# EAGLE board untitled (EAGLE 7.2.0)
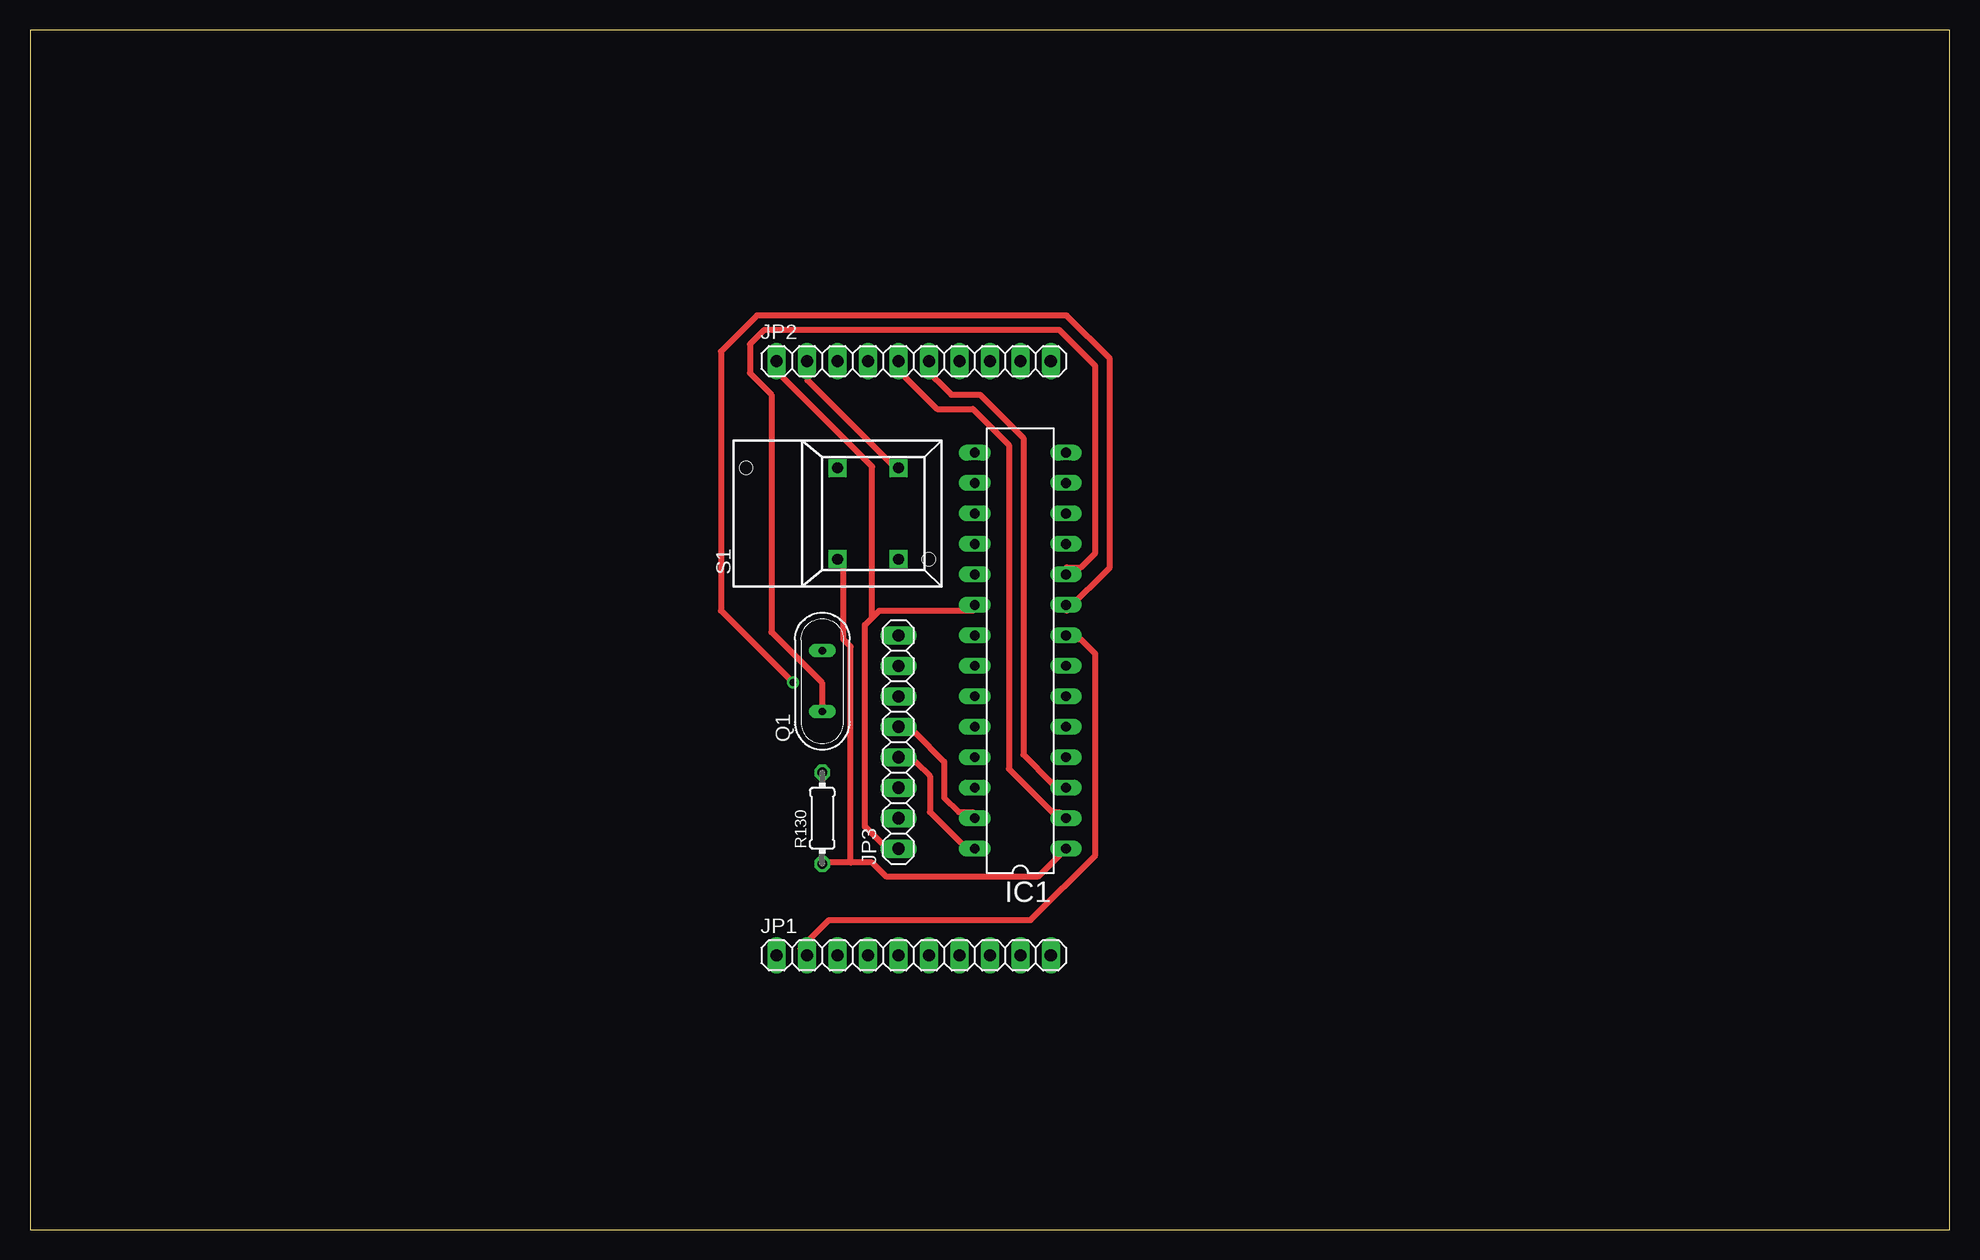
[diagram p0: board, top side]
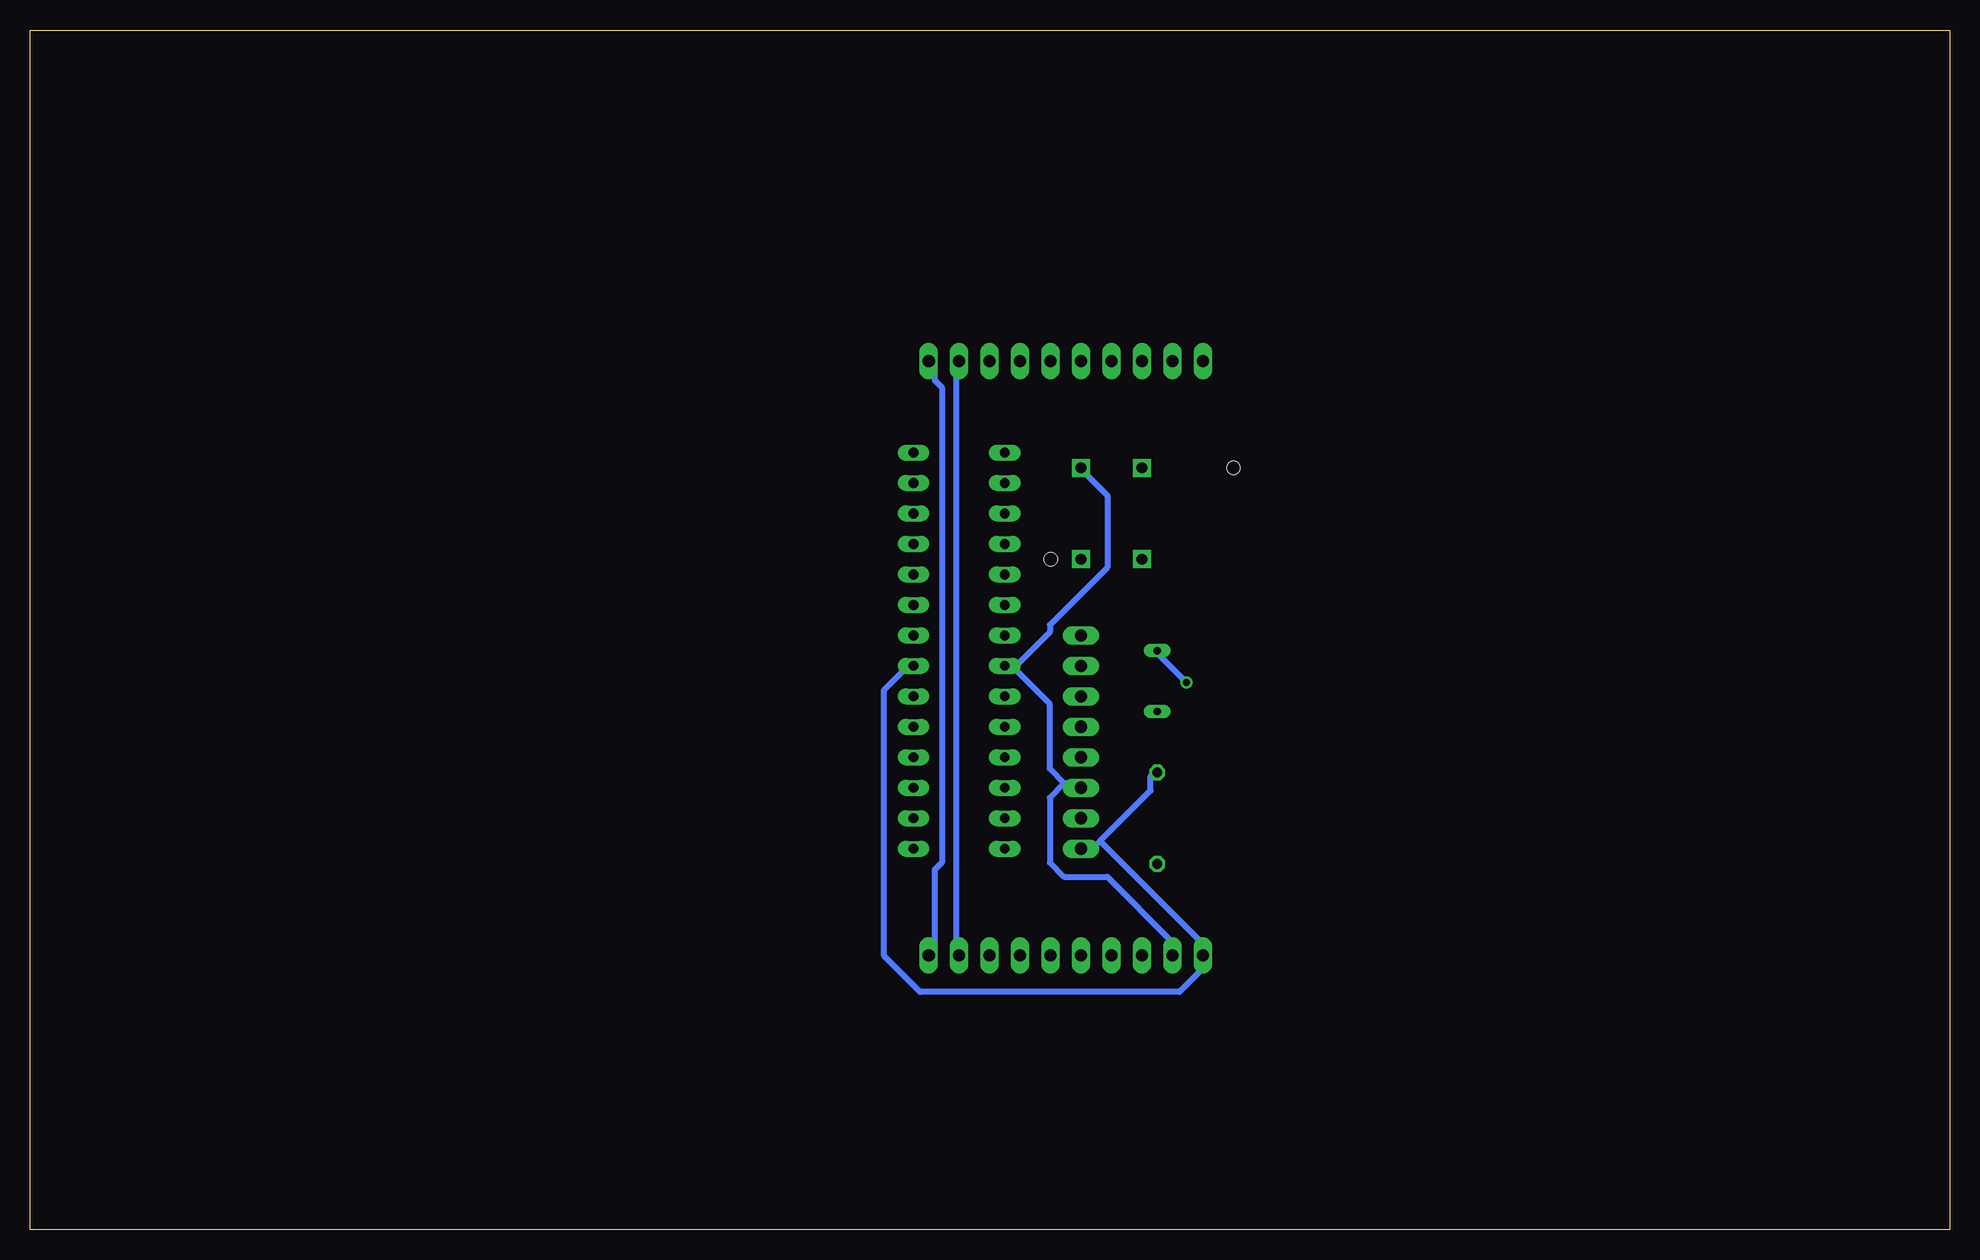
[diagram p1: board, bottom side, seen from below]

Size 160 x 100 mm. Coordinates in mm from the lower left corner, seen from the top.
Outline: 0,0 160,0 160,100 0,100 0,0
Copper layers (1*16): Top 0.035mm / dielectric 1.5mm / Bottom 0.035mm
Design rules "default *": minimum track width 0.5mm, minimum drill 24mil, track to track 0.7mm, track to pad 0.7mm, pad to pad 0.7mm, via to via 0.7mm, smd to smd 0.7mm, copper to edge 40mil, drill to drill 8mil, minimum pad ring 10mil, minimum via ring 8mil, stop-mask expansion 4mil, vias tented up to drill 0mil, thermal gap 10mil

## Footprints (pad centres in the part's own frame; a part is rotated, then mirrored left to right if it is on the bottom)
DIL28-3 = drill 0.813 long: 1 -16.51,-3.81; 2 -13.97,-3.81; 3 -11.43,-3.81; 4 -8.89,-3.81; 5 -6.35,-3.81; 6 -3.81,-3.81; 7 -1.27,-3.81; 8 1.27,-3.81; 9 3.81,-3.81; 10 6.35,-3.81; 11 8.89,-3.81; 12 11.43,-3.81; 13 13.97,-3.81; 14 16.51,-3.81; 15 16.51,3.81; 16 13.97,3.81; 17 11.43,3.81; 18 8.89,3.81; 19 6.35,3.81; 20 3.81,3.81; 21 1.27,3.81; 22 -1.27,3.81; 23 -3.81,3.81; 24 -6.35,3.81; 25 -8.89,3.81; 26 -11.43,3.81; 27 -13.97,3.81; 28 -16.51,3.81
1X10 = drill 1.016 long: 1 -11.43,0; 2 -8.89,0; 3 -6.35,0; 4 -3.81,0; 5 -1.27,0; 6 1.27,0; 7 3.81,0; 8 6.35,0; 9 8.89,0; 10 11.43,0
1X08 = drill 1.016 long: 1 -8.89,0; 2 -6.35,0; 3 -3.81,0; 4 -1.27,0; 5 1.27,0; 6 3.81,0; 7 6.35,0; 8 8.89,0
QS = drill 0.61 long: 1 -2.54,0; 2 2.54,0
0204/7 = drill 0.813 octagon: 1 -3.81,0; 2 3.81,0
5501 = drill 0.9 pad 1.5 square: 1A 0,3.81; 1B 0,-3.81; NC 5.08,-3.81; NO 5.08,3.81 | hole 1.1: -7.62,3.81; 7.62,-3.81

## Placement (x,y rotation side)
IC1  ATMEGA168-PU  [DIL28-3]  82.55,48.26 90 top
JP1  [1X10]  73.66,22.86 0 top
JP2  [1X10]  73.66,72.39 0 top
JP3  [1X08]  72.39,40.64 90 top
Q1  [QS]  66.04,45.72 90 top
R130  130 ohms  [0204/7]  66.04,34.29 90 top
S1  5501  [5501]  67.31,59.69 0 top

## Library data of the parts
IC1 = Arduino-AVR
JP1-JP3 = pinhead
Q1 = special
R130 = eagle-ltspice; SPICEMODEL: NONE; SPICEPREFIX: R
S1 = switch

## Nets
N$1: IC1.1 R130.1 S1.1B
N$2: IC1.7 IC1.20 JP1.1 JP2.1 JP3.1 R130.2
N$3: IC1.8 IC1.22 JP1.2 JP2.2 JP3.3 S1.NO
N$4: JP1.9 JP2.9
N$5: JP1.10 JP2.10
N$6: IC1.28 JP3.4
N$7: IC1.27 JP3.5
N$9: IC1.9 Q1.2
N$10: IC1.10 Q1.1
N$12: IC1.2 JP2.5
N$13: IC1.3 JP2.6

## Tracks (layer width: path | path; a pad name or v marks a point on that pad's centre or on a via)
N$1
  Top 0.5: 68.4,30.6 70.2,30.6 71.4,29.4 84,29.4 85.8,31.2 IC1.1 | 68.4,30.6 66.6,30.6 R130.1 | 68.4,30.6 68.4,48.6 67.8,49.2 67.8,55.8 S1.1B
N$2
  Top 0.5: 70.2,51 69.6,50.4 69.6,33.6 72,31.2 JP3.1 | 70.2,51 70.8,51.6 78.6,51.6 IC1.20 | 70.2,51 70.2,63.6 62.4,71.4 62.4,72 JP2.1
  Bottom 0.5: IC1.7 86.4,46.8 87,46.8 88.8,45 88.8,22.8 85.8,19.8 64.2,19.8 62.4,21.6 62.4,22.8 JP1.1 62.4,23.4 62.4,24 70.8,32.4 | 70.8,32.4 72,31.2 JP3.1 | 70.8,32.4 66.6,36.6 66.6,37.8 R130.2
N$3
  Top 0.5: IC1.8 86.4,49.2 87.6,49.2 88.8,48 88.8,31.2 83.4,25.8 66.6,25.8 64.2,23.4 JP1.2 | S1.NO 72,63.6 64.8,70.8 64.8,72 JP2.2
  Bottom 0.5: 78,46.8 78.6,46.8 IC1.22 78,46.8 | 78,46.8 75,43.8 75,38.4 73.8,37.2 | 73.8,37.2 72.6,37.2 JP3.3 73.8,37.2 | 78,46.8 75,49.8 75,50.4 70.2,55.2 70.2,61.2 72,63 S1.NO | 73.8,37.2 75,36 75,30.6 73.8,29.4 70.2,29.4 64.8,24 64.8,23.4 JP1.2
N$4
  Bottom 0.5: JP1.9 82.8,23.4 82.8,72 JP2.9
N$5
  Bottom 0.5: JP1.10 84.6,23.4 84.6,30 84,30.6 84,70.2 84.6,70.8 84.6,72 JP2.10
N$6
  Top 0.5: IC1.28 78.6,31.8 78,31.8 75,34.8 75,37.8 73.8,39 72.6,39 JP3.4
N$7
  Top 0.5: IC1.27 78.6,34.8 77.4,34.8 76.2,36 76.2,39 73.8,41.4 72.6,41.4 JP3.5
N$9  (via drill 0.61)
  Top 0.5: v63.6,45.6 57.6,51.6 57.6,73.2 60.6,76.2 86.4,76.2 90,72.6 90,55.2 86.4,51.6 IC1.9
  Bottom 0.5: v63.6,45.6 66,48 Q1.2
N$10
  Top 0.5: Q1.1 66,43.2 66,45.6 61.8,49.8 61.8,69.6 60,71.4 60,73.8 61.2,75 85.8,75 88.8,72 88.8,56.4 87.6,55.2 86.4,55.2 IC1.10
N$12
  Top 0.5: IC1.2 85.8,34.8 85.2,34.8 81.6,38.4 81.6,65.4 78.6,68.4 75.6,68.4 72,72 JP2.5
N$13
  Top 0.5: IC1.3 85.8,37.2 85.2,37.2 82.8,39.6 82.8,66 79.2,69.6 76.8,69.6 74.4,72 JP2.6

## Text on the board
Text: V | G | R | T | R1 | T1 | D | C | G | V | V | G | R1 | T1